# Altium PCB Esp-Nextion.PcbDoc
Units mm, origin at the board's own origin, x right, y up, seen from the top; angles counter-clockwise.
Board outline 52.32 x 82.3 mm, 2 copper layers (Top Layer, Bottom Layer); 8 components, 10 nets, 58 pads, 10 vias.
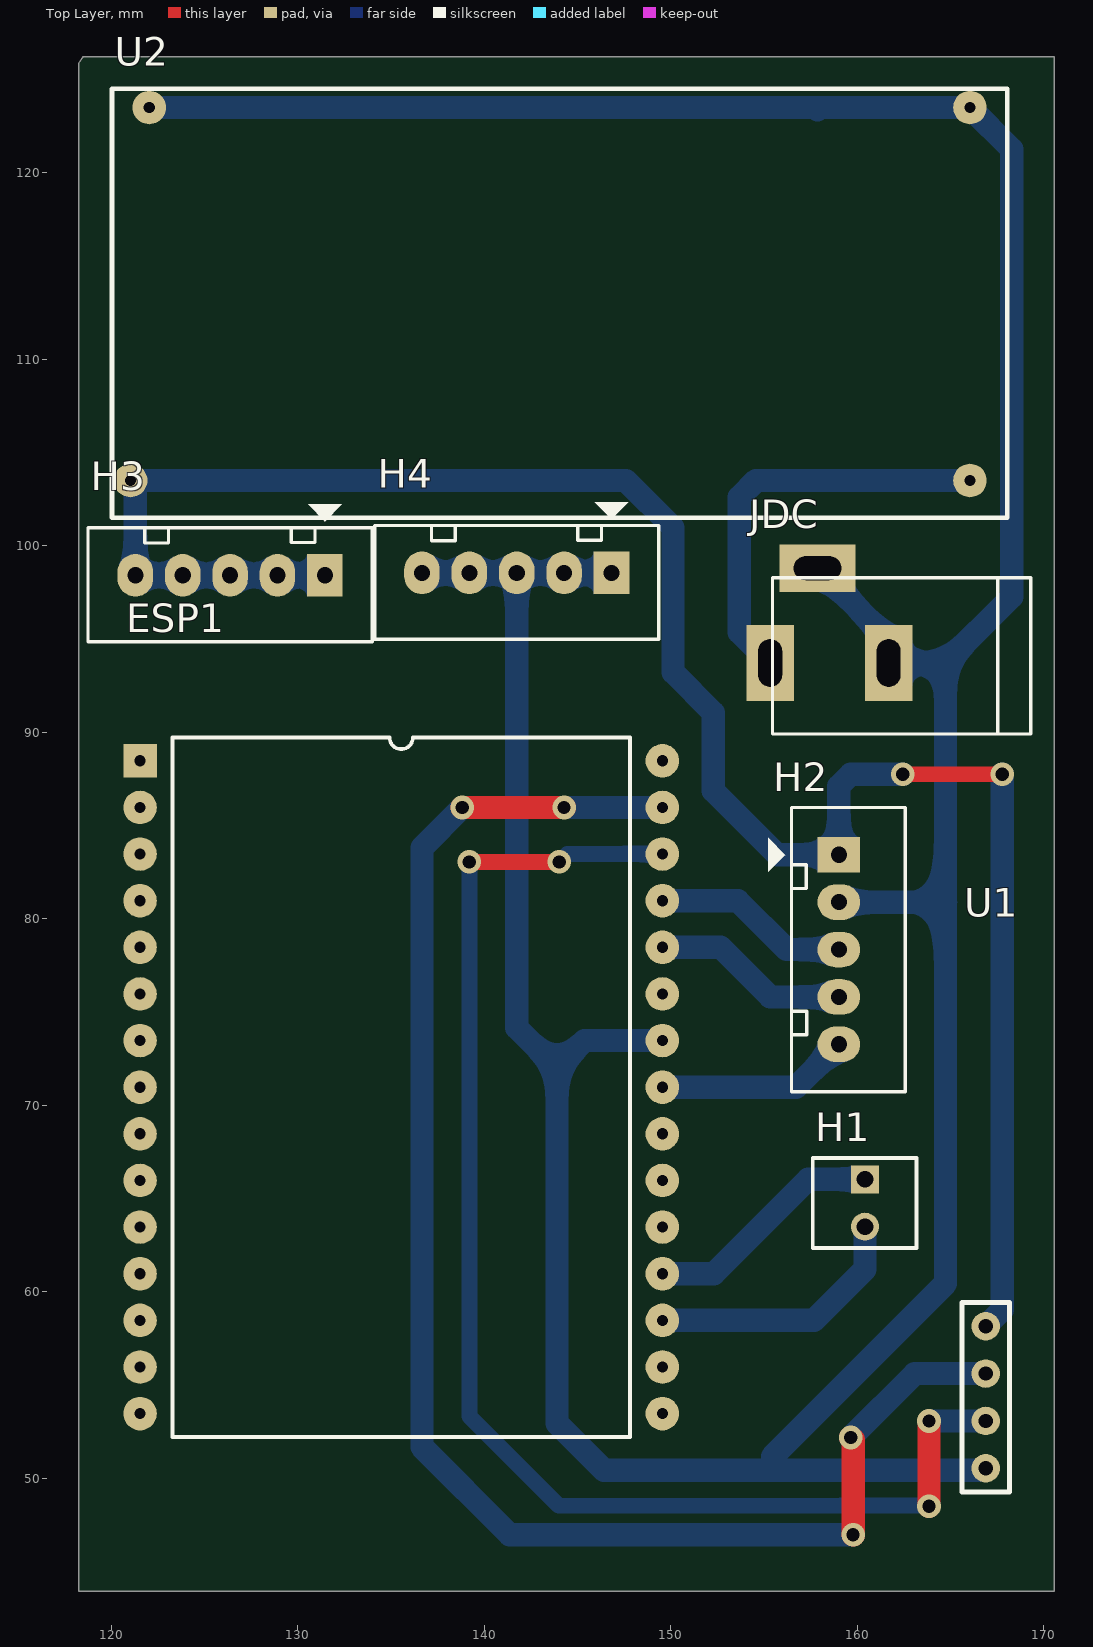
[diagram p0: Top Layer view]
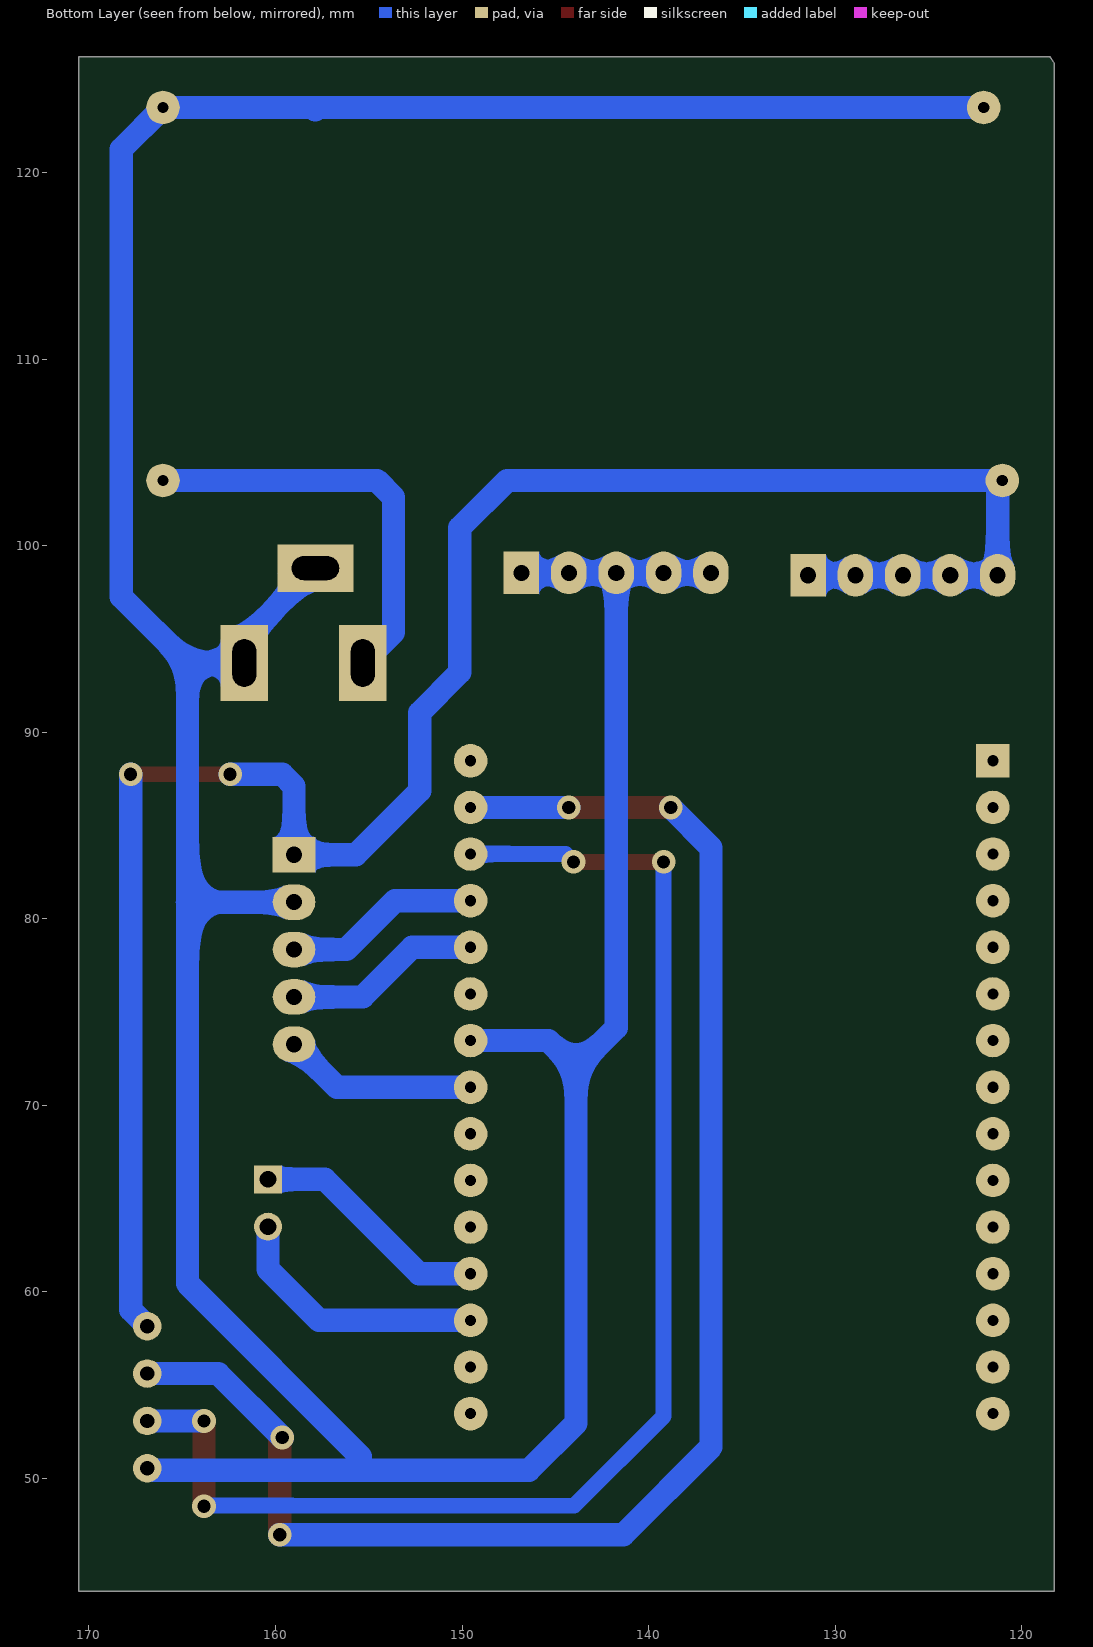
[diagram p1: Bottom Layer view, seen from below]

## Layer stack, top to bottom
Top Solder: solder mask 0.0102, Solder Resist, Dk 3.5
Top Layer: signal copper 0.0356
Dielectric 1: dielectric 0.32, FR-4, Dk 4.8
Bottom Layer: signal copper 0.0356
Bottom Solder: solder mask 0.0102, Solder Resist, Dk 3.5

## Board outline
118.237,125.857 118.237,43.942 170.561,43.942 170.561,126.238 118.491,126.238

## Design rules (kind name [scope] priority, off if disabled: settings)
Clearance [All] p1: gap=0.5 ignorepadtopadclearanceinfootprint=FALSE
PolygonConnect [All] p1: connectstyle=Relief reliefconductorwidth=0.254 reliefentries=4 polygonreliefangle="90 Angle" airgapwidth=0.254
RoutingVias [All] p1: holewidth=0.711 width=1.27 viastyle="Through Hole" minholewidth=0.711 minwidth=1.27 maxholewidth=0.711 maxwidth=1.27
SolderMaskExpansion [All] p1: expansion=0.102
Width [All] p1: maxlimit=1.75 minlimit=0.85 preferedwidth=1.25
30 further rules are at their usual default settings.

## Components (designator, comment, footprint, x,y, rotation, side; value= is the part's Value field where it differs from the comment)
ESP1 "ESP8266 V3" "ESP8266 V3" 121.539,88.479 r0 top
H1 "Header2" HDR2 160.401,66.04 r270 top
H2 "Header5" Header5 159.004,83.439 r270 top
H3 "Header5" Header5 131.445,98.425 r180 top
H4 "Header5" Header5 146.812,98.552 r180 top
JDC "Jac DC" DC-IN 158.496,96.266 r180 top
U1 "NEXTION" NEXTION 166.878,58.166 r270 top
U2 "LM2596" LM2596 166.031,103.505 r180 top

## Footprints (in the part's own frame and the unit in brackets; to place one, negate y for a bottom-side part, rotate by r counter-clockwise, add the part's x,y. Pads: shape width x height; smd on the part's side, far side on the other; paste and mask are expansions set on the pad)
DC-IN [mil] "Jac DC input"
  rect 100x160 hole 50 slot 100 at 90 deg: 1(125,100) 2(-125,100)
  rect 160x100 hole 50 slot 100 at 0 deg: 3(25,-100)
  silkscreen extent -425,-80 120,250, body extent -410,-105 134,269, height 434
"ESP8266 V3" [mm]
  rect 1.8x1.8 hole 0.6: 1(0,0)
  round 1.8 hole 0.6: 2(0,-2.5) 3(0,-5) 4(0,-7.5) 5(0,-10) 6(0,-12.5) 7(0,-15) 8(0,-17.5) 9(0,-20) 10(0,-22.5) 11(0,-25) 12(0,-27.5) 13(0,-30) 14(0,-32.5) 15(0,-35) 16(28,-35) 17(28,-32.5) 18(28,-30) 19(28,-27.5) 20(28,-25) 21(28,-22.5) 22(28,-20) 23(28,-17.5) 24(28,-15) 25(28,-12.5) 26(28,-10) 27(28,-7.5) 28(28,-5) 29(28,-2.5) 30(28,0)
  silkscreen extent 1.73,-36.25 26.27,1.25, body extent 1.4,-42.7 26.95,6.12, height 5.35
HDR2 [mm] "Connector; Header; 2 Position"
  rect 1.5x1.5 hole 0.9: 1(0,0)
  round 1.5 hole 0.9: 2(2.54,0)
  silkscreen extent -1.14,-2.79 3.68,2.77, body extent -1.27,-2.92 3.81,2.88, height 11.72
Header5 [mil] "CON5"
  rect 75x90 hole 34: 1(0,0)
  oval 75x90 hole 34: 2(100,0) 3(200,0) 4(300,0) 5(400,0)
  silkscreen extent -100,-150 500,140, body extent -93,-93 493,133, height 276
LM2596 [mm]
  round 1.8 hole 0.6: 1(0,0) 2(0,-20) 3(44,-20) 4(45,0)
  silkscreen extent -2,-21 46,2, body extent -2,-21.5 46,1.5, height 13.09
NEXTION [mil]
  round 60 hole 30: 1(0,0) 2(100,0) 3(200,0) 4(300,0)
  silkscreen extent -50,-50 350,50, body extent -834,-50 1134,3308, height 411

## Part data
ESP1: "ESP8266"
H1: "Header IDC, 2 x 1 Pin Vertical 2.54mm Pitch (Non-Boxed, Male)"
H2 H3 H4: "Header IDC, 5 x 1 Pin Vertical 2.54mm Pitch (Non-Boxed, Male)"
JDC: library part DCIN, "Jac DC input"

## Via types
v1: diameter 1.27, hole 0.711, Top Layer to Bottom Layer, 10 vias

## Nets (pads, with @x,y where several pads share a name; then routed paths per layer and width w, separated by ;. In a path a pad name is that pad's centre, name@x,y a point inside that pad or via, vN(x,y) a via of type N, cw(c..) or ccw(c..) an arc to the next point about the centre after c; other vN are vias at no path point)
5v: H2.1 H3.1 H3.2 H3.3 H3.4 H3.5 U1.1 U2.4 | length 111.3
  Top Layer w0.85: v1(162.433,87.757) v1(167.767,87.757)
  Bottom Layer w1.25: H3.1 H3.2 H3.3 H3.4 H3.5 121.285,103.251 U2.4 147.574,103.505 150.114,100.965 150.114,93.218 152.273,91.059 152.273,86.868 155.702,83.439 H2.1 159.004,87.122 159.639,87.757 v1(162.433,87.757) ; U1.1 167.767,59.055 v1(167.767,87.757)
12v: JDC.1 U2.1 | length 22.3
  Bottom Layer w1.25: JDC.1 153.67,95.377 153.67,102.616 154.559,103.505 U2.1
GND: ESP1.24 H2.2 H4.1 H4.2 H4.3 H4.4 H4.5 JDC.2 JDC.3 U1.4 U2.2 U2.3 | length 225.9
  Bottom Layer w1.25: U2.3 157.734,123.505 ; H4.5 H4.4 H4.3 ; H4.1 H4.2 H4.3 ; ESP1.24 145.361,73.479 143.891,72.009 ; JDC.3 161.671,94.996 JDC.2 164.719,93.726 ; 157.861,123.378 157.734,123.505 ; H2.2 164.719,80.899 ; U1.4 166.769,50.437 155.448,50.437 ; H4.3 141.732,74.168 143.891,72.009 ; 143.891,72.009 143.891,52.959 146.413,50.437 155.448,50.437 ; 155.448,50.437 155.448,51.181 164.719,60.452 164.719,80.899 ; 157.734,123.505 U2.2 168.275,121.261 168.275,97.282 164.719,93.726 ; 164.719,80.899 164.719,93.726
NetESP1_18: ESP1.18 H1.2 | length 14.3
  Bottom Layer w1.25: ESP1.18 157.666,58.479 160.401,61.214 H1.2
NetESP1_19: ESP1.19 H1.1 | length 13
  Bottom Layer w1.25: ESP1.19 152.292,60.979 157.353,66.04 H1.1
NetESP1_23: ESP1.23 H2.5 | length 10.4
  Bottom Layer w1.25: ESP1.23 156.704,70.979 H2.5
NetESP1_26: ESP1.26 H2.4 | length 10.6
  Bottom Layer w1.25: ESP1.26 152.661,78.479 155.321,75.819 H2.4
NetESP1_27: ESP1.27 H2.3 | length 10.6
  Bottom Layer w1.25: ESP1.27 153.59,80.979 156.21,78.359 H2.3
NetESP1_28: ESP1.28 U1.3 | length 74.5
  Top Layer w0.85: v1(139.192,83.058) v1(144.018,83.058)
  Top Layer w1.25: v1(163.83,48.514) v1(163.83,53.086)
  Bottom Layer w0.85: v1(139.192,83.058) 139.192,53.34 143.992,48.54 159.11,48.54 159.12,48.55 163.794,48.55 v1(163.83,48.514) ; v1(144.018,83.058) 144.439,83.479 ESP1.28
  Bottom Layer w1.25: v1(163.83,53.086) U1.3
NetESP1_29: ESP1.29 U1.2 | length 84.9
  Top Layer w1.25: v1(138.811,85.979) v1(144.272,85.979) ; v1(159.639,52.197) 159.766,52.07 v1(159.766,46.99)
  Bottom Layer w1.25: v1(138.811,85.979) 136.652,83.82 136.652,51.689 141.351,46.99 v1(159.766,46.99) ; v1(144.272,85.979) ESP1.29 ; v1(159.639,52.197) 163.068,55.626 U1.2
pads on no net: ESP1.1 ESP1.2 ESP1.3 ESP1.4 ESP1.5 ESP1.6 ESP1.7 ESP1.8 ESP1.9 ESP1.10 ESP1.11 ESP1.12 ESP1.13 ESP1.14 ESP1.15 ESP1.16 ESP1.17 ESP1.20 ESP1.21 ESP1.22 ESP1.25 ESP1.30